# Altium PCB 多普勒1.0.PcbDoc
Units mil, origin at the board's own origin, x right, y up, seen from the top; angles counter-clockwise.
Board outline 3935 x 3935 mil, 2 copper layers (Top Layer, Bottom Layer); 98 components, 79 nets, 364 pads, 52 vias.
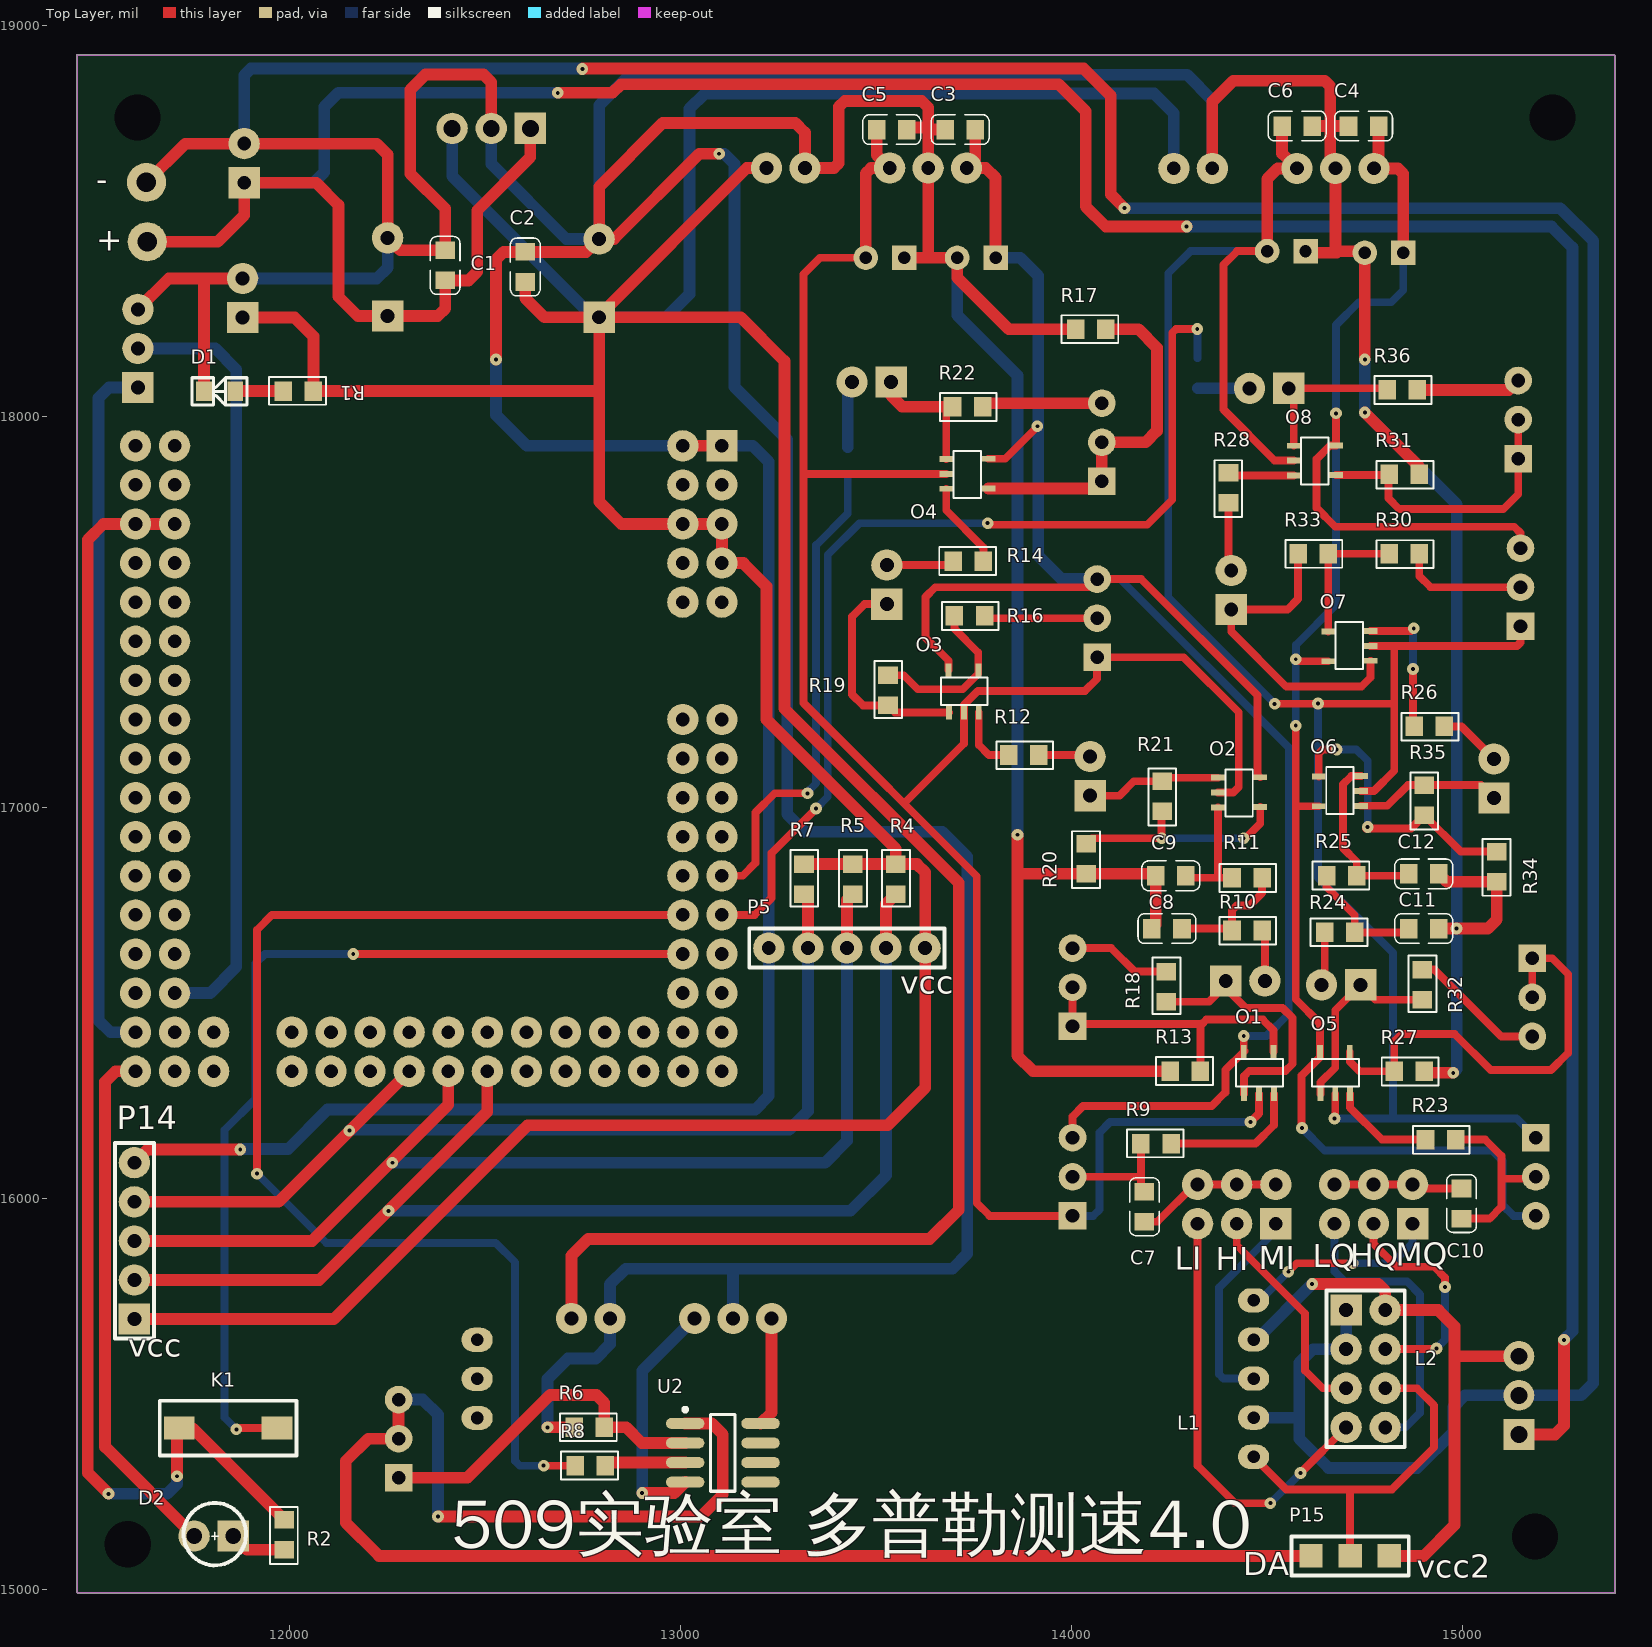
[diagram p0: Top Layer view]
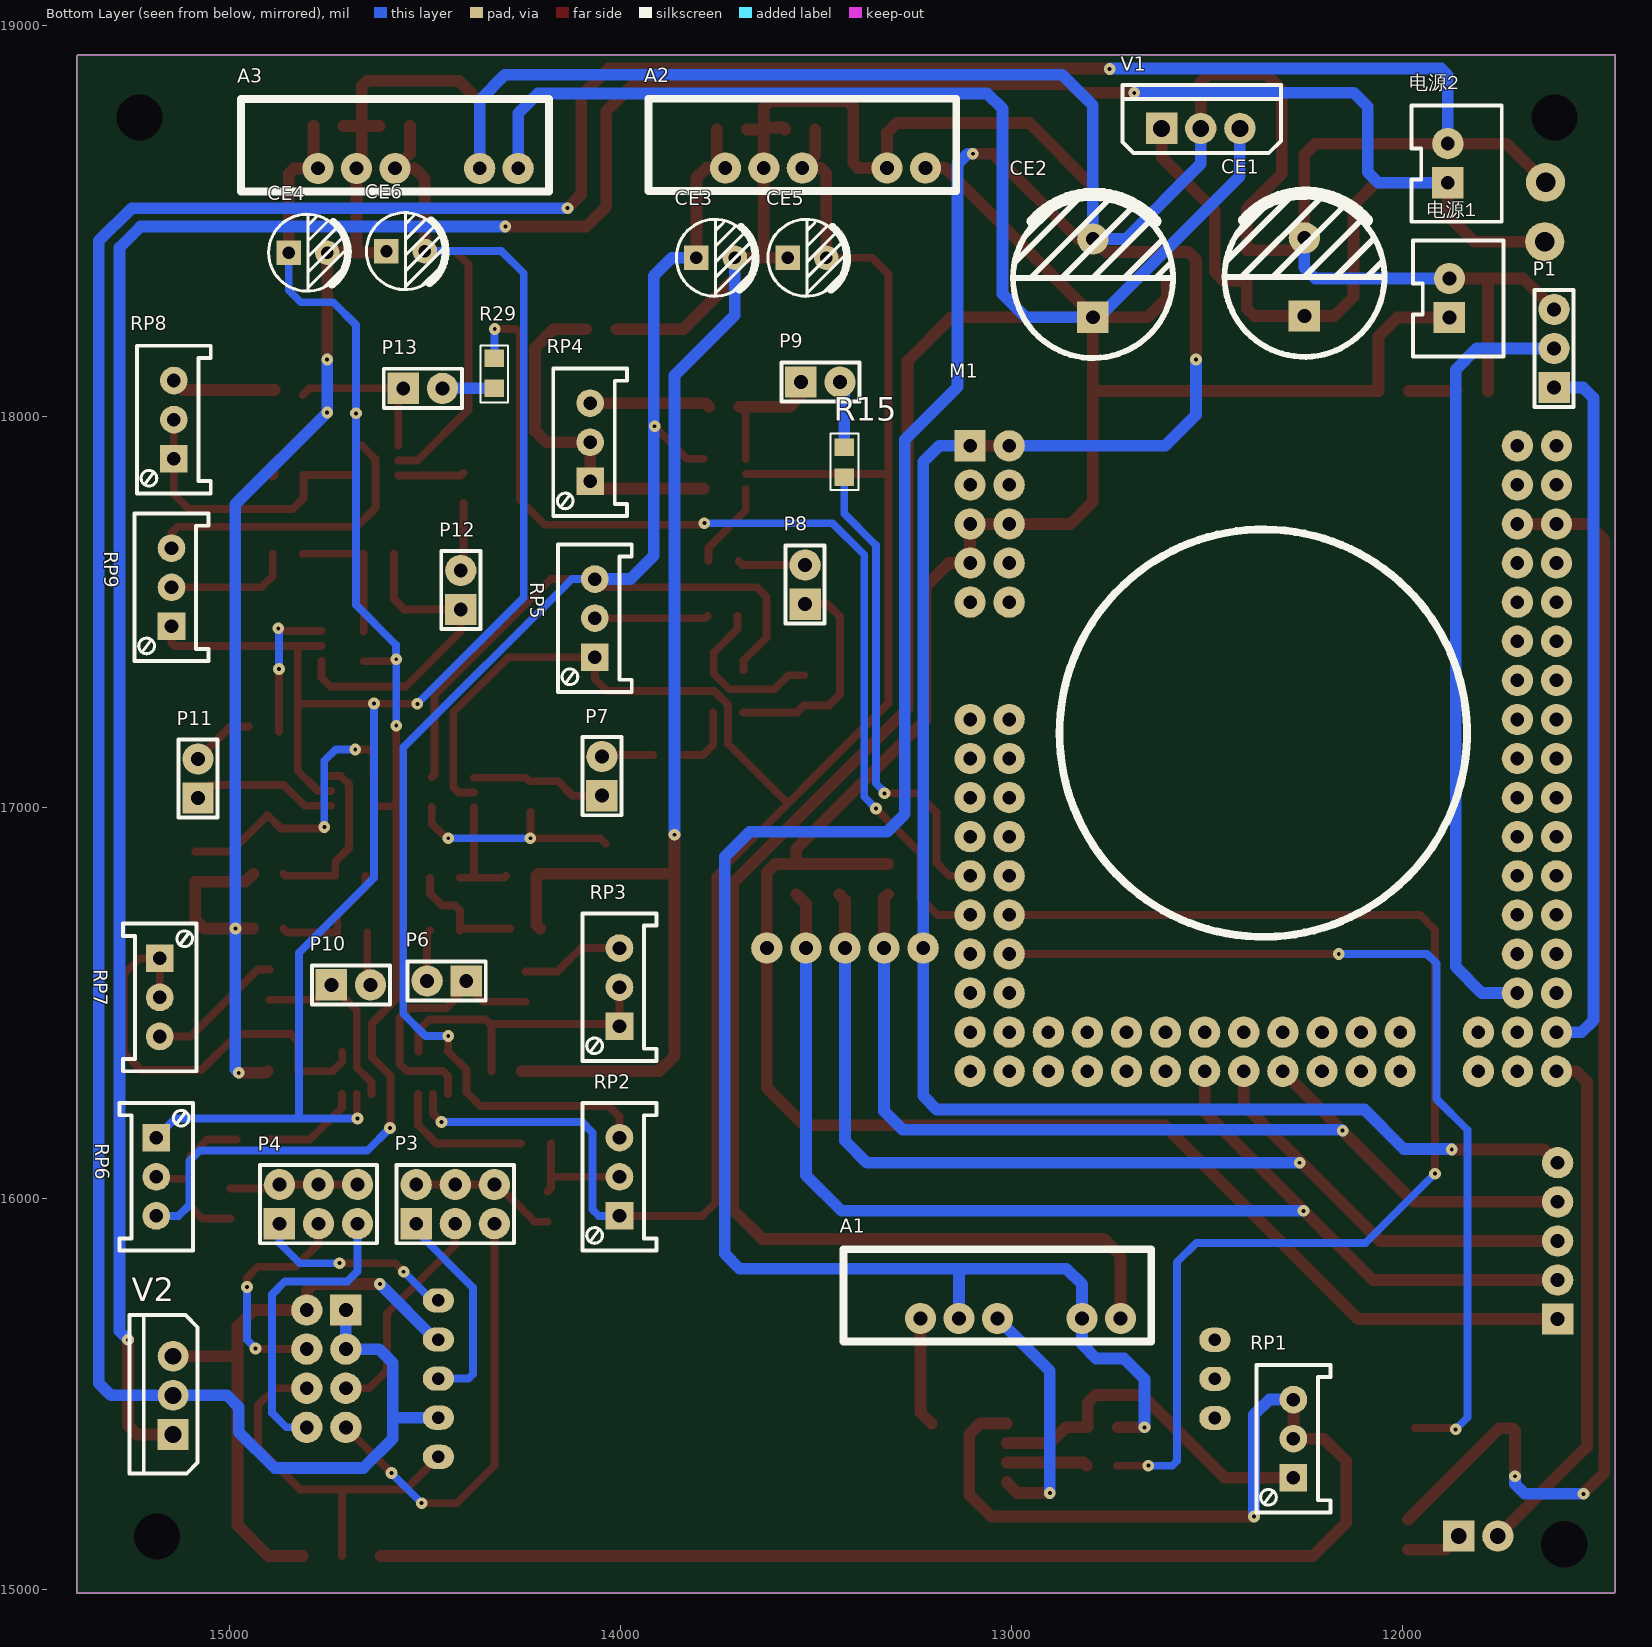
[diagram p1: Bottom Layer view, seen from below]

## Layer stack, top to bottom
Top Solder: solder mask 0.4, Solder Resist, Dk 3.5
Top Layer: signal copper 1.4
Dielectric 1: dielectric 12.6, FR-4, Dk 4.8
Bottom Layer: signal copper 1.4
Bottom Solder: solder mask 0.4, Solder Resist, Dk 3.5

## Board outline
11457,14990 11455,14992 11455,18925 15388,18925 15390,18923 15390,14991 15389,14990

## Design rules (kind name [scope] priority, off if disabled: settings)
Clearance [All] p1: gap=10
PolygonConnect [All] p1: connectstyle=Relief reliefconductorwidth=20 reliefentries=4 polygonreliefangle="45 Angle" airgapwidth=10
RoutingVias [All] p1: holewidth=10 width=30 viastyle="Through Hole" minholewidth=10 minwidth=20 maxholewidth=28 maxwidth=50
SolderMaskExpansion [All] p1: expansion=4
Width [All] p1: maxlimit=30 minlimit=10 preferedwidth=20 minimp=50.000000 maximp=50.000000 favimp=50.000000
30 further rules are at their usual default settings.

## Components (designator, comment, footprint, x,y, rotation, side; value= is the part's Value field where it differs from the comment)
A1 "0509" 0509 13017,15756 r0 bottom
A2 "0509" 0509 13516,18699 r0 bottom
A3 "0509" 0509 14558,18698 r0 bottom
C1 "106" CAP[0805] 12397,18425 r270 top
C2 "106" CAP[0805] 12602,18421 r270 top
C3 "103" CAP[0805] 13676,18734 r0 top
C4 "103" CAP[0805] 14708,18743 r0 top
C5 "103" CAP[0805] 13501,18734 r0 top
C6 "103" CAP[0805] 14538,18743 r0 top
C7 "106" CAP[0805] 14186,15940 r90 top
C8 "103" CAP[0805] 14282,16690 r180 top
C9 "103" CAP[0805] 14292,16825 r180 top
C10 "106" CAP[0805] 14997,16025 r270 top
C11 "103" CAP[0805] 14862,16690 r0 top
C12 "103" CAP[0805] 14862,16830 r0 top
CE1 "470UF" "CAP 5.0*10*16" 12250,18357 r90 bottom
CE2 "100UF" "CAP 5.0*10*16" 12791,18354 r90 bottom
CE3 "10uf" "CAP 2.5*5*11 - BK" 13756,18406 r180 bottom
CE4 "10uf" "CAP 2.5*5*11 - BK" 14799,18419 r180 bottom
CE5 "10uf" "CAP 2.5*5*11 - BK" 13522,18406 r180 bottom
CE6 "10uf" "CAP 2.5*5*11 - BK" 14549,18423 r180 bottom
D1 "LED" LED[0805] 11860,18064 r180 top
D2 "LED" LED 11855,15136 r180 top
K1 "KEY_2" KEY_2 11717,15412 r0 top
L1 "K-LC6雷达" K-LC6雷达 13530,15597 r0 top
L2 "K-MC雷达" K-MC1雷达 14748,15568 r0 top
M1 "VET6_SUKAI" VET6_SUKAI 12335,17215 r180 bottom
O1 "opa820" opa820_5 14467,16310 r90 top
O2 "opa820" opa820_5 14417,17050 r0 top
O3 "opa820" opa820_5 13712,17286 r90 top
O4 "opa820" opa820_5 13722,17865 r0 top
O5 "opa820" opa820_5 14662,16310 r90 top
O6 "opa820" opa820_5 14697,17030 r180 top
O7 "opa820" opa820_5 14721,17401 r180 top
O8 "opa820" opa820_5 14611,17899 r0 top
P1 "H1X3" H2.54_1X3#1 11611,18074 r90 bottom
P3 "H2X3" H2.54_2X3 14522,15935 r180 bottom
P4 "H2X3" H2.54_2X3 14872,15935 r180 bottom
P5 "H1X5" H2.54_1X5#1 13425,16640 r0 top
P6 "H1X2" H2.54_1X2 14394,16556 r0 bottom
P7 "H1X2" H2.54_1X2 14047,17030 r90 bottom
P8 "H1X2" H2.54_1X2 13527,17520 r90 bottom
P9 "H1X2" H2.54_1X2 13538,18088 r180 bottom
P10 "H1X2" H2.54_1X2 14739,16546 r180 bottom
P11 "H1X2" H2.54_1X2 15080,17024 r90 bottom
P12 "H1X2" H2.54_1X2 14408,17506 r90 bottom
P13 "H1X2" H2.54_1X2 14555,18072 r180 bottom
P14 "H1X5" H2.54_1X5#2 11602,15891 r90 top
P15 "H1X3" H2.54_1X3#2 14812,15085 r180 top
R1 "RES" RES[0805] 11983,18065 r0 top
R2 "RES" RES[0805] 11985,15101 r90 top
R4 "RES" RES[0805] 13550,16855 r270 top
R5 "RES" RES[0805] 13440,16855 r270 top
R6 "RES" RES[0805] 12727,15414 r0 top
R7 "RES" RES[0805] 13315,16855 r270 top
R8 "RES" RES[0805] 12730,15316 r0 top
R9 "1K" RES[0805] 14177,16140 r0 top
R10 "2K" RES[0805] 14487,16685 r180 top
R11 "2K" RES[0805] 14487,16820 r180 top
R12 "1K" RES[0805] 13916,17134 r180 top
R13 "1K" RES[0805] 14252,16325 r0 top
R14 "1K" RES[0805] 13697,17630 r0 top
R15 "1K" RES[0805] 13427,17921 r270 bottom
R16 "1K" RES[0805] 13777,17490 r180 top
R17 "1K" RES[0805] 14010,18223 r0 top
R18 "1K" RES[0805] 14242,16580 r270 top
R19 "1K" RES[0805] 13530,17338 r270 top
R20 "1K" RES[0805] 14037,16830 r90 top
R21 "1K" RES[0805] 14232,16990 r90 top
R22 "1K" RES[0805] 13772,18025 r180 top
R23 "1K" RES[0805] 14982,16150 r180 top
R24 "2K" RES[0805] 14647,16680 r0 top
R25 "2K" RES[0805] 14652,16825 r0 top
R26 "1K" RES[0805] 14953,17207 r180 top
R27 "1K" RES[0805] 14902,16325 r180 top
R28 "1K" RES[0805] 14401,17779 r90 top
R29 "1K" RES[0805] 14322,18072 r90 bottom
R30 "1K" RES[0805] 14889,17648.33 r180 top
R31 "1K" RES[0805] 14889,17851.67 r180 top
R32 "1K" RES[0805] 14897,16585 r270 top
R33 "1K" RES[0805] 14656,17649 r180 top
R34 "1K" RES[0805] 15087,16810 r90 top
R35 "1K" RES[0805] 14902,16980 r90 top
R36 "1K" RES[0805] 14884,18068 r180 top
RP1 "10K" 3296W 12278,15385 r90 bottom
RP2 "50k" 3296W 14002,16055 r90 bottom
RP3 "50K" 3296W 14002,16540 r90 bottom
RP4 "10K" 3296W 14077,17934 r90 bottom
RP5 "10k" 3296W 14065,17484 r90 bottom
RP6 "50k" 3296W 15187,16055 r270 bottom
RP7 "50K" 3296W 15178,16514 r270 bottom
RP8 "10K" 3296W 15142,17992 r90 bottom
RP9 "10k" 3296W 15148,17563 r90 bottom
U2 "LM358" SOP_8 13011,15424 r0 top
V1 "78xx" TO220A#1 12515,18737 r180 bottom
V2 "78xx" TO220A#2 15144,15496 r90 bottom
电源1 "HDR-1X2" XH2.54-LI-2P 11879,18303 r90 bottom
电源2 "HDR-1X2" XH2.54-LI-2P 11883,18648 r90 bottom

## Footprints (in the part's own frame and the unit in brackets; to place one, negate y for a bottom-side part, rotate by r counter-clockwise, add the part's x,y. Pads: shape width x height; smd on the part's side, far side on the other; paste and mask are expansions set on the pad)
0509 [mil]
  round 80 hole 35: 1(-296.81,63.34) 2(-198.39,63.34) 3(18.15,63.34) 4(116.58,63.34) 5(215,63.34)
  silkscreen extent -376,-114 412,122, body extent -365,-100 400,115, height 354
3296W [mm] "Precise Multi-Winding Adjustable Resistor"
  rect 1.8x1.8 hole 0.889: 1(-2.54,0)
  round 1.8 hole 0.889: 2(0,0) 3(2.54,0)
  silkscreen extent -4.8,-2.4 4.8,2.4, body extent -4.75,-2.4 4.75,2.4, height 11.52
"CAP 2.5*5*11 - BK" [mm] "脚距2.5mm直径5mm高度11mm"
  rect 1.6x1.6 hole 0.8: 1(-1.25,0)
  round 1.6 hole 0.8: 2(1.25,0)
  silkscreen extent -2.55,-2.5 2.6,2.5, body extent -2.5,-2.5 2.51,2.5, height 11.04
"CAP 5.0*10*16" [mil] "脚距5mm直径10mm高度16mm"
  rect 80x80 hole 35.43: 1(-100,0)
  round 80 hole 35.43: 2(100,0)
  silkscreen extent -204,-205 217,204, body extent -197,-197 197,197, height 631
CAP[0805] [mm]
  rect 1.14x1.27 smd: 1(0,0) 2(1.956,0)
  silkscreen extent -0.9,-0.97 2.86,0.97, body extent -0.05,-0.63 1.95,0.62, height 0.78
H2.54_1X2 [mil]
  rect 80x80 hole 35.43: 1(0,0)
  round 80 hole 35.43: 2(100,0)
  silkscreen extent -50,-50 150,50, body extent -50,-50 150,50, height 336
H2.54_1X3#1 [mil]
  rect 80x80 hole 35.43: 1(0,0)
  round 80 hole 35.43: 2(100,0) 3(200,0)
  silkscreen extent -50,-50 250,50, body extent -50,-50 250,50, height 336
H2.54_1X3#2 [mil]
  rect 60x60 smd: 1(0,0) 2(100,0) 3(200,0)
  silkscreen extent -50,-50 250,50, body extent -50,-50 250,50, height 336
H2.54_1X5#1 [mil]
  round 80 hole 35.43: 1(-200,0) 2(-100,0) 3(0,0) 4(100,0) 5(200,0)
  silkscreen extent -250,-50 250,50, body extent -250,-50 250,50, height 336
H2.54_1X5#2 [mil]
  rect 80x80 hole 35.43: 1(-200,0)
  round 80 hole 35.43: 2(-100,0) 3(0,0) 4(100,0) 5(200,0)
  silkscreen extent -250,-50 250,50, body extent -250,-50 250,50, height 336
H2.54_2X3 [mil]
  rect 80x80 hole 35.43: 1(0,0)
  round 80 hole 35.43: 2(0,100) 3(100,0) 4(100,100) 5(200,0) 6(200,100)
  silkscreen extent -50,-50 250,150, body extent -50,-50 250,150, height 98
K-LC6雷达 [mil] "K-LC6雷达模块"
  oval 80x62 / inner oval 100x50 / far side oval 80x62 hole 32: 0(-1051.18,-159.06) 0(-1051.18,-59.06) 0(-1051.18,40.94) 1(935.04,141.73) 2(935.04,41.73) 3(935.04,-58.27) 4(935.04,-158.27) 5(935.04,-258.27)
K-MC1雷达 [mm] "K-MC1雷达"
  rect 2.032x2.032 hole 0.9: 1(-1.17,3.71)
  round 2.032 hole 0.9: 2(1.37,3.71) 3(-1.17,1.17) 4(1.37,1.17) 5(-1.17,-1.37) 6(1.37,-1.37) 7(-1.17,-3.91) 8(1.37,-3.91)
  silkscreen extent -2.44,-5.18 2.64,4.98, body extent -2.57,-5.18 2.51,4.98, height 8.38
KEY_2 [mm]
  rect 2x1.5 smd: 1(0,0) 2(6.35,0)
  silkscreen extent -1.27,-1.78 7.62,1.78, body extent 0.13,-1.85 6.23,1.85, height 2.5
LED [mil]
  rect 80x80 hole 40: 1(0,0)
  round 80 hole 40: 2(100,0)
  silkscreen extent -33,-85 127,75, body extent -32,-74 107,84, height 205
LED[0805] [mil]
  rect 40x50 smd: 1(0,0) 2(80,0)
  silkscreen extent -30,-35 110,35, body extent 0,-17 81,19, height 33
opa820_5 [mil]
  rect 35.43x15 smd: 1(-43,26) 2(-43,-12) 3(-43,-50) 4(65,-49) 5(65,27)
  silkscreen extent -24,-73 46,47
RES[0805] [mm]
  rect 1.14x1.27 smd: 1(0,0) 2(1.956,0)
  silkscreen extent -0.91,-0.89 2.77,0.91, body extent -0.01,-0.63 1.99,0.63, height 0.55
SOP_8 [mm]
  oval 2.5x0.7 smd: 1(0,0) 2(0,-1.27) 3(0,-2.54) 4(0,-3.81) 5(4.9,-3.81) 6(4.9,-2.54) 7(4.9,-1.27) 8(4.9,0)
  silkscreen extent -0.12,-4.41 3.25,1.02, body extent -0.54,-4.35 5.45,0.55, height 1.55
TO220A#1 [mil] "220，3脚晶体管  封装库来自淘宝卖家 ID：黄晶宝石"
  rect 80x80 hole 43.31: 1(-100,0)
  round 80 hole 43.31: 2(0,0) 3(100,0)
  silkscreen extent -200,-63 205,111, body extent -203,-60 203,114, height 728
TO220A#2 [mil] "220，3脚晶体管  封装库来自淘宝卖家 ID：黄晶宝石"
  rect 78.74x78.74 hole 43.31: 1(-100,0)
  round 78.74 hole 43.31: 2(0,0) 3(100,0)
  silkscreen extent -200,-63 205,111, body extent -203,-60 203,114, height 728
VET6_SUKAI [mil]
  rect 80x80 hole 35: 1(-770,710)
  round 80 hole 35: 2(-670,710) 3(-770,610) 4(-670,610) 5(-770,510) 6(-670,510) 7(-770,410) 8(-670,410) 9(-770,310) 10(-670,310) 15(-770,10) 16(-670,10) 17(-770,-90) 18(-670,-90) 19(-770,-190) 20(-670,-190) 21(-770,-290) 22(-670,-290) 23(-770,-390) 24(-670,-390) 25(-770,-490) 26(-670,-490) 27(-770,-590) 28(-670,-590) 29(-770,-690) 30(-670,-690) 31(-770,-790) 32(-670,-790) 33(-770,-890) 34(-670,-890) 35(-570,-890) 36(-570,-790) 37(-470,-890) 38(-470,-790) 39(-370,-890) 40(-370,-790) 41(-270,-890) 42(-270,-790) 43(-170,-890) 44(-170,-790) 45(-70,-890) 46(-70,-790) 47(30,-890) 48(30,-790) 49(130,-890) 50(130,-790) 51(230,-890) 52(230,-790) 53(330,-890) 54(330,-790) 57(530,-890) 58(530,-790) 59(630,710) 60(730,710) 61(630,610) 62(730,610) 63(630,510) 64(730,510) 65(630,410) 66(730,410) 67(630,310) 68(730,310) 69(630,210) 70(730,210) 71(630,110) 72(730,110) 73(630,10) 74(730,10) 75(630,-90) 76(730,-90) 77(630,-190) 78(730,-190) 79(630,-290) 80(730,-290) 81(630,-390) 82(730,-390) 83(630,-490) 84(730,-490) 85(630,-590) 86(730,-590) 87(630,-690) 88(730,-690) 89(630,-790) 90(730,-790) 91(630,-890) 92(730,-890)
  silkscreen extent -541,-546 501,496, body extent -820,-940 780,760, height 335
XH2.54-LI-2P [mil] "接插件，2P  淘宝ID:黄晶宝石   店铺网址:https://shop463601444.taobao.com"
  rect 80x80 hole 35.43: 1(-50,0)
  round 80 hole 35.43: 2(50,0)
  silkscreen extent -150,-138 147,93, body extent -148,-130 148,94, height 278

## Part data
C1 C2 C3 C4 C5 C6 C7 C8 C9 C10 C11 C12: library part CAP
CE1 CE2 CE3 CE4 CE5 CE6: library part CE, "直插电解电容"
R9 R10 R11 R12 R13 R14 R15 R16 R17 R18 R19 R20 R21 R22 R23 R24 R25 R26 R27 R28 R29 R30 R31 R32 R33 R34 R35 R36: library part RES
RP1 RP2 RP3 RP4 RP5 RP6 RP7 RP8 RP9: library part RP, "单联电位器"
V1 V2: "LM78XX系列线性稳压芯片"
电源1 电源2: library part "Header 2", "2P接插件"

## Free pads (board coordinates)
  round 80 hole 118.11: 0(11585,15115) 0(11610,18765) 0(15185,15135) 0(15230,18765)
  round 100 hole 50: 2(11633,18599) 3(11635,18447)

## Via types
v1: diameter 30, hole 10, Top Layer to Bottom Layer, 52 vias

## Nets (pads, with @x,y where several pads share a name; then routed paths per layer and width w, separated by ;. In a path a pad name is that pad's centre, name@x,y a point inside that pad or via, vN(x,y) a via of type N, cw(c..) or ccw(c..) an arc to the next point about the centre after c; other vN are vias at no path point)
3.3V: K1.1 M1.63 M1.64 R2.2 | length 3397.7
  Top Layer w30: v1(11536,15244) 11482.5,15297.5 11482.5,17684.5 11523,17725 M1.64 M1.63 ; v1(11711,15289) 11711,15406 K1.1 11751,15412 R2.2
  Bottom Layer w30: v1(11536,15244) 11686,15244 11711,15269 v1(11711,15289)
+5V: A2.5 C3.2 CE3.1 O1.5 O2.5 O3.5 O4.5 RP2.3 RP5.3 | length 5111.2
  Top Layer w20: O3.5 13685,17375 13626,17434 13626,17538 13651,17563 14044,17563 RP5.3 14178,17584 14475,17287 14475,17084 O2.5 ; O4.5 13830,17892 v1@13909.5,17971.5 ; RP2.3 14002,16209 14029,16236 14358,16236 14393,16271 14393,16328 O1.5 14442,16377 14440,16379 v1(14440,16415)
  Top Layer w30: C3.2 13753,18657.65 A2.5 13780.34,18635.65 13805.21,18610.79 CE3.1
  Bottom Layer w20: RP5.3 14124,17584 14555,17153 14555,16472 14498,16415 v1(14440,16415)
  Bottom Layer w30: CE3.1 13868,18406 13914,18360 13914,17644 13974,17584 RP5.3
  other v1: 13912,17975
+5V2: A3.5 C4.2 CE4.1 O5.5 O6.5 O7.5 O8.5 RP6.3 RP9.3 | length 4607.8
  Top Layer w20: 14573,17008 14578,17003 O6.5 ; v1(14573,17209) 14573,16509 14635,16447 O5.5 14635,16361 14588,16314 14588,16181 v1(14589,16180) ; v1(14573,17379) 14578,17374 O7.5 ; v1(14676,18008) O8.5 14661,17926 14626,17891 14626,17766 14674,17718 15132,17718 15148,17702 RP9.3
  Top Layer w30: C4.2 14785,18646.65 A3.5 14834.34,18634.65 14848.21,18620.79 CE4.1
  Bottom Layer w20: v1(14573,17209) v1(14573,17379) 14574,17378 14574,17416 14676,17518 v1(14676,18008) 14676,18234 14734,18292 14817,18292 14848.21,18323.21 CE4.1 ; v1(14589,16180) 14647,16122 15076,16122 15102,16096 15102,15983 15130,15955 RP6.3
+9V: A1.5 U2.8 | length 280.3
  Top Layer w30: U2.8 13232,15452.09 A1.5
-5V: A2.3 C5.1 CE5.2 O1.2 O2.2 O3.2 O4.2 RP2.1 RP5.1 | length 5917.2
  Top Layer w20: CE5.2 13356,18406 13314,18364 13314,17855 ; 13568,17013 13574,17013 13724,17163 O3.2 13724,17262 13760,17298 14034,17298 14065,17329 RP5.1 14286,17384 14427,17243 14427,17052 14413,17038 O2.2 ; O4.2 13316,17853 13314,17855 ; RP2.1 13790,15955 13757,15988 13757,16824 13314,17267 13314,17855 ; v1(14457,16195) 14479,16217 O1.2
  Top Layer w30: CE5.2 13472.79,18621.79 13486.66,18635.65 A2.3 13501,18668.81 C5.1
  Bottom Layer w20: RP2.1 14055,15955 14071,15971 14071,16168 14098,16195 v1(14457,16195)
-5V2: A3.3 C6.1 CE6.2 O5.2 O6.2 O7.2 O8.2 RP6.1 RP9.1 | length 5520
  Top Layer w20: CE6.2 14423,18423 14388,18388 14388,18018 14519,17887 O8.2 ; v1(14519,17265) 14825,17265 ; v1(14672,16204) 14674,16206 O5.2 ; O6.2 14773,17042 14825,17094 14825,17265 ; O7.2 14824,17413 ; RP9.1 15148,17422 15139,17413 14824,17413 ; 14824,17413 14825,17412 14825,17265
  Top Layer w30: CE6.2 14499.79,18607.79 14526.66,18634.65 A3.3 14538,18672.81 C6.1
  Bottom Layer w20: CE6.2 14304,18423 14247,18366 14247,17537 v1(14519,17265) ; v1(14630,17266) 14630,16820 14822,16628 14822,16208 14818,16204 ; v1(14672,16204) 14818,16204 ; RP6.1 15138,16204 14818,16204
-9V: A1.3 U2.4 | length 623.8
  Top Layer w30: v1(12901,15246) 12983,15246 U2.4
  Bottom Layer w30: v1(12901,15246) 12901,15558.5 A1.3
DA: M1.26 R8.1 | length 3149.7
  Top Layer w20: v1(11916,16063) 11916,16687 11954,16725 M1.26 ; v1(12649,15316) R8.1
  Bottom Layer w20: v1(11916,16063) 12093,15886 12526,15886 12576,15836 12576,15328 12588,15316 v1(12649,15316)
ENABLE: M1.33
GND: A1.2 A1.4 A2.2 A2.4 A3.2 A3.4 C1.1 C2.1 C3.1 C4.1 C5.2 C6.2 C8.2 C9.2 C11.2 C12.2 CE1.2 CE2.2 CE3.2 CE4.2 CE5.1 CE6.1 D1.2 L1.4 L2.1 L2.3 M1.1 M1.2 P1.3 P5.1 P14.5 pad.2 R6.1 R13.1 R17.1 R20.1 R27.1 R31.1 R34.1 V1.2 V2.2 电源1.2 电源2.2 | length 33404.6
  Top Layer w30: P14.5 11636,16125 v1(11873,16125) ; P1.3 11690,18353 11782,18353 ; pad.2 11732,18698 电源2.2 12222,18698 12250,18670 CE1.2 12282,18425 C1.1 12397,18532 12308,18621 12308,18836 12347,18875 12495,18875 12515,18855 V1.2 ; D1.2 11780,18351 11782,18353 ; 电源1.2 11782,18353 ; v1(12527,18146) 12527,18401 12547,18421 C2.1 12758,18421 CE2.2 ; v1(12659,15414) R6.1 ; v1(12748,18889) 12749,18890 14031,18890 14100,18821 14100,18568 v1(14135,18533) ; M1.2 M1.1 ; v1(13098,18672) 13047,18672 12829,18454 CE2.2 ; CE5.1 13633,18406 ; C5.2 13583.42,18739.42 13632.58,18739.42 ; C3.1 13632.58,18734 ; R17.1 13839,18223 13706.79,18355.21 CE3.2 13633,18406 ; C8.2 14215,16700 C9.2 14210,16830 R20.1 13868,16830 13861,16837 v1(13861,16930) 13861,16365 13901,16325 R13.1 ; A3.2 14359.61,18805.62 14413,18859 14647,18859 14661,18845 14661,18745 ; CE6.1 14602.21,18419 14678.15,18419 14674.58,18422.58 ; C6.2 14659,18743 14661,18745 ; C4.1 14663,18743 14661,18745 ; v1(14749.79,18010.21) 14889,17871 R31.1 ; v1(14749.79,18145.79) CE4.2 14746.21,18422.58 14674.58,18422.58 ; R27.1 14906,16321 v1(14976,16321) ; C11.2 v1(14984,16690) 15064,16690 15087,16713 R34.1 14959,16810 C12.2 ; CE2.2 12791,18588 12954,18751 13293,18751 13317.61,18726.38 A2.2 13391.66,18635.65 13404,18648 13404,18792 13419,18807 13616,18807 13632.58,18790.42 13632.58,18739.42 ; 13632.58,18734 A2.4 13632.58,18406.42 13633,18406 ; 13632.58,18734 13632.58,18739.42 ; 14661,18745 14661,18648.23 A3.4 14674.58,18422.58
  Bottom Layer w30: v1(11873,16125) 11874,16126 11995,16126 12096,16227 13190,16227 13225,16262 P5.1 13225,17884 13184,17925 M1.1 ; 电源1.2 12222,18353 12250,18381 CE1.2 ; 电源2.2 11883,18873 11900,18890 12747,18890 v1(12748,18889) ; V1.2 12515,18646 12707,18454 CE2.2 12791,18796 12869,18874 14295,18874 14359.61,18809.38 A3.2 ; v1(12527,18146) 12527,18004 12606,17925 M1.2 ; v1(12659,15414) 12659,15538 12711,15590 12782,15590 12818.61,15626.61 A1.2 12818.61,15779.61 12859,15820 13695,15820 13733,15858 13733,16874 13669,16938 13317,16938 13272,16983 13272,17941 13137,18076 13137,18646 13111,18672 v1(13098,18672) ; 13127,15820 13133.58,15813.42 A1.4 ; CE3.2 13706.79,18259.21 13861,18105 v1(13861,16930) ; v1(14135,18533) 15250,18533 15334,18449 15334,15527 15303,15496 V2.2 15006,15496 14976,15466 14976,15402 14884,15310 14657,15310 14582,15385 14582,15579 14617.06,15614.06 L2.3 L2.1 ; L1.4 14577.73,15438.73 14582,15443 ; v1(14749.79,18145.79) v1(14749.79,18010.21) 14985,17775 14985,16330 v1(14976,16321)
IFI: C7.1 P3.2 P3.4 P3.6 | length 375.4
  Top Layer w20: C7.1 14219,15940 14314,16035 P3.6 P3.4 P3.2
IFIOUT: M1.23 R15.2 | length 1238.3
  Top Layer w20: M1.23 13158,16825 13191,16858 13191,16987 13240,17036 v1(13324,17036)
  Bottom Layer w20: v1(13324,17036) 13320,17036 13346,17062 13346,17671 13427,17752 R15.2
IFQ: C10.1 P4.2 P4.4 P4.6 | length 329.1
  Top Layer w20: P4.6 P4.4 P4.2 14882,16025 C10.1
IFQOUT: M1.25 R29.2 | length 2595.7
  Top Layer w20: M1.25 13189,16725 13232,16768 13232,16883 v1(13346,16997) ; v1(13785,17727) 13789,17723 14193,17723 14257,17787 14257,18214 14267,18224 v1(14321,18224)
  Bottom Layer w20: v1(13346,16997) 13376,17027 13376,17646 13457,17727 v1(13785,17727) ; v1(14321,18224) 14322,18223 R29.2
KEY: K1.2 M1.28 | length 2445.3
  Top Layer w20: v1(11863,15409) 11866,15412 K1.2 ; v1(12162,16625) M1.28
  Bottom Layer w20: v1(11863,15409) 11833,15439 11833,16175 11912,16254 11912,16601 11936,16625 v1(12162,16625)
NetC1_2: C1.2 CE1.1 pad.3 V1.1 V2.1 电源2.1 | length 8809.3
  Top Layer w30: pad.3 11815,18447 11883,18515 电源2.1 12067,18598 12124,18541 12124,18307 12174,18257 CE1.1 12378,18257 12397,18276 C1.2 12457,18348 12479,18370 12479,18527 12615,18663 V1.1 ; v1(12685,18828) 12825,18828 12847,18850 13967,18850 14036,18781 14036,18537 14087,18486 v1(14294,18486) ; V2.1 15237,15396 15259,15418 v1(15259,15638)
  Bottom Layer w30: 电源2.1 12061,18598 12088,18625 12088,18792 12124,18828 v1(12685,18828) ; v1(14294,18486) 15227,18486 15281,18432 15281,15660 v1(15259,15638)
NetC7_2: C7.2 R9.1 RP2.2 | length 303
  Top Layer w20: RP2.2 14174,16055 14177,16052 ; R9.1 14177,16052 ; C7.2 14177,16026 14177,16052
NetC8_1: C8.1 R10.2 R11.1 | length 316.3
  Top Layer w20: C8.1 14405,16690 R10.2 14410,16737 14422,16749 14455,16749 14487,16781 R11.1
NetC9_1: C9.1 O2.3 R11.2 | length 301.3
  Top Layer w20: C9.1 14297,16820 14377,16820 ; O2.3 14374,16823 14377,16820 ; R11.2 14377,16820
NetC10_2: C10.2 R23.1 RP6.2 | length 469.5
  Top Layer w20: R23.1 15058,16150 15099,16109 15099,16050 ; C10.2 15069,15948 15099,15978 15099,16050 ; RP6.2 15182,16050 15099,16050
NetC11_1: C11.1 R24.2 R25.1 | length 317
  Top Layer w20: R25.1 14652,16796 14724,16724 R24.2 14852,16680 C11.1
NetC12_1: C12.1 O6.3 R25.2 | length 438.3
  Top Layer w20: O6.3 14715,17080 14694,17059 14694,16896 14729,16861 R25.2 14857,16825 C12.1
NetD1_1: D1.1 R1.1 | length 123.4
  Top Layer w30: D1.1 11861,18065 R1.1
NetD2_1: D2.1 R2.1 | length 144.5
  Top Layer w30: D2.1 11890,15101 R2.1
NetL1_1: L1.1 P4.1 | length 517
  Top Layer w20: v1(14554,15812) 14576,15834 v1(14718,15834)
  Bottom Layer w20: L1.1 14480.73,15738.73 v1(14554,15812) ; v1(14718,15834) 14820,15834 14872,15886 P4.1
NetL1_3: L1.3 P3.1 | length 537.8
  Bottom Layer w20: L1.3 14388.27,15538.73 14377,15550 14377,15772 14522,15917 P3.1
NetL2_4: L2.4 P4.3 | length 592
  Top Layer w20: P4.3 14772,15884 14831,15825 14927,15825 14955,15797 v1(14955,15773) ; L2.4 14931.06,15614.06 v1(14933,15616)
  Bottom Layer w20: v1(14933,15616) 14955,15638 v1(14955,15773)
NetL2_5: L2.5 P3.3 | length 572
  Top Layer w20: P3.3 14422,15880 14597,15705 14597,15559 14641.94,15514.06 L2.5
NetL2_7: L2.7 P3.5 | length 1119.2
  Top Layer w20: P3.5 14322,15316 14418,15220 v1(14508,15220) ; v1(14585,15297) 14585,15297.13 L2.7
  Bottom Layer w20: v1(14508,15220) v1(14585,15297)
NetL2_8: L2.8 P4.5 | length 772.8
  Bottom Layer w20: P4.5 14672,15813 14698,15787 14858,15787 14891,15754 14891,15451 14854.06,15414.06 L2.8
NetM1_43: M1.43 P5.4 P14.2 R4.2 | length 3225.2
  Top Layer w30: P14.2 12075,15791 v1(12252,15968) 12505,16221 M1.43 ; P5.4 13525,16753 R4.2
  Bottom Layer w30: v1(12252,15968) 13434,15968 13525,16059 P5.4
NetM1_45: M1.45 P5.3 P14.3 R5.2 | length 2856.6
  Top Layer w30: P14.3 12057,15891 12405,16239 M1.45 ; P5.3 13425,16763 R5.2
  Bottom Layer w30: v1(12262,16091) 13369,16091 13425,16147 P5.3
NetM1_47: M1.47 P5.2 P14.4 R7.2 | length 2594.2
  Top Layer w30: P14.4 11971,15991 M1.47 ; R7.2 13325,16768 P5.2
  Bottom Layer w30: v1(12152,16173) 12154,16175 13277,16175 13325,16223 P5.2
NetO1_1: O1.1 P6.1 R18.2 | length 680.5
  Top Layer w20: R18.2 14351,16503 14394,16546 14394,16538 14445,16487 14539,16487 14565,16461 14565,16344 14547,16326 14454,16326 14441,16313 O1.1
NetO1_3: O1.3 R9.2 | length 362.5
  Top Layer w20: R9.2 14470,16140 14517,16187 O1.3
NetO1_4: O1.4 R13.2 RP3.1 RP3.2 | length 809.9
  Top Layer w20: RP3.2 RP3.1 14008,16446 14333,16446 ; R13.2 14329,16442 14333,16446 ; O1.4 14516,16430 14489,16457 14344,16457 14333,16446
NetO2_1: O2.1 P7.1 R21.2 | length 346.1
  Top Layer w20: P7.1 14122,17030 14159,17067 R21.2 14241,17076 O2.1
NetO2_4: O2.4 R20.2 R21.1 | length 581.2
  Top Layer w20: R20.2 14051,16921 v1(14230,16921) R21.1@14230,16988 ; v1(14440,16921) 14440,16917 14482,16959 O2.4
  Bottom Layer w20: v1(14230,16921) v1(14440,16921)
NetO3_1: O3.1 P8.1 R19.2 | length 568.3
  Top Layer w20: P8.1 13470,17520 13438,17488 13438,17289 13466,17261 R19.2 13548,17243 O3.1
NetO3_3: O3.3 R12.2 | length 170.8
  Top Layer w20: O3.3 13762,17160 13788,17134 R12.2
NetO3_4: O3.4 R16.2 R19.1 | length 435.7
  Top Layer w20: R19.1 13570,17338 13606,17302 13721,17302 13761,17342 O3.4 13761,17396 13700,17457 R16.2
NetO4_1: O4.1 P9.1 R22.2 | length 344.2
  Top Layer w20: O4.1 13679,18009 R22.2
  Top Layer w30: P9.1 13538,18053 13566,18025 R22.2
NetO4_3: O4.3 R14.2 | length 224.4
  Top Layer w20: O4.3 13679,17760 13774,17665 R14.2
NetO4_4: O4.4 R17.2 RP4.1 RP4.2 | length 913.9
  Top Layer w30: O4.4 14059,17816 RP4.1 RP4.2 14189,17934 14218,17963 14218,18176 14171,18223 R17.2
NetO5_1: O5.1 P10.1 R32.2 | length 495.4
  Top Layer w20: O5.1 14636,16296 14674,16334 14674,16481 P10.1 14777,16508 R32.2
NetO5_3: O5.3 R23.2 | length 262
  Top Layer w20: O5.3 14712,16232 14794,16150 R23.2
NetO5_4: O5.4 R27.2 RP7.1 RP7.2 | length 1145.1
  Top Layer w20: O5.4 14711,16350 14736,16325 R27.2 14825,16402 14843,16420 14980,16420 15072,16328 15226,16328 15270,16372 15270,16573 15229,16614 RP7.1 RP7.2
NetO6_1: O6.1 P11.1 R35.2 | length 375.6
  Top Layer w20: O6.1 14807,17004 14860,17057 R35.2 15047,17057 P11.1
NetO6_4: O6.4 R34.2 R35.1 | length 761.4
  Top Layer w20: O6.4 14632,17138 14642,17148 v1(14678,17148) ; v1(14757,16950) 14753,16946 14868,16946 R35.1 14995,16887 R34.2
  Bottom Layer w20: v1(14678,17148) 14728,17148 14757,17119 v1(14757,16950)
NetO7_1: O7.1 P12.1 R33.2 | length 821.1
  Top Layer w20: R33.2 14579,17533 14552,17506 P12.1 14408,17450 14549,17309 14741,17309 14764,17332 O7.1
NetO7_3: O7.3 R26.2 | length 378.7
  Top Layer w20: O7.3 14868,17451 v1(14875,17458) ; R26.2@14873,17194 14873,17249 v1(14873,17354)
  Bottom Layer w20: v1(14873,17354) 14873,17456 v1(14875,17458)
NetO7_4: O7.4 R30.2 R33.1 | length 355.3
  Top Layer w20: O7.4 R33.1 14811.33,17649 R30.2
NetO8_1: O8.1 P13.1 R36.2 | length 416.4
  Top Layer w20: O8.1 14568,18059 P13.1 14795,18072 R36.2@14812,18055
NetO8_3: O8.3 R28.2 | length 169.9
  Top Layer w20: R28.2 14408,17849 O8.3
NetO8_4: O8.4 R31.2 RP8.1 RP8.2 | length 743.5
  Top Layer w20: O8.4 14810.33,17850 14810.33,17790.67 14838,17763 15104,17763 15142,17801 RP8.1 RP8.2
NetP6_2: P6.2 R10.1 | length 141.9
  Top Layer w20: R10.1 14494,16678 P6.2@14494,16546
NetP7_2: P7.2 R12.1 | length 132.7
  Top Layer w20: R12.1 14043,17134 P7.2
NetP8_2: P8.2 R14.1 | length 174.1
  Top Layer w20: P8.2 13687,17620 R14.1
NetP9_2: P9.2 R15.1 | length 171.6
  Bottom Layer w30: R15.1 13427,18077 P9.2
NetP10_2: P10.2 R24.1 | length 137.3
  Top Layer w20: P10.2 14647,16554 R24.1
NetP11_2: P11.2 R26.1 | length 163.4
  Top Layer w20: R26.1@14951,17207 14997,17207 P11.2
NetP12_2: P12.2 R28.1 | length 175.9
  Top Layer w20: R28.1 14401,17613 P12.2
NetP13_2: P13.2 R29.1 | length 133
  Bottom Layer w30: R29.1 P13.2
NetP15_3: P15.3 RP1.2 RP1.3 U2.1 | length 4310.8
  Top Layer w30: RP1.3 RP1.2 12200,15385 12143,15328 12143,15170 12228,15085 P15.3 ; v1(12379,15186) 13051,15186 13107,15242 13107,15396 13079,15424 U2.1
  Bottom Layer w30: RP1.3 12340,15485 12379,15446 v1(12379,15186)
NetR6_2: R6.2 RP1.1 U2.2 | length 908.7
  Top Layer w30: RP1.1 12454,15285 12666,15497 12784,15497 12804,15477 R6.2 12860,15414 12900,15374 U2.2
NetR8_2: R8.2 U2.3 | length 207.3
  Top Layer w30: R8.2 12815,15324 U2.3
NetR16_1: R16.1 RP5.2 | length 290.5
  Top Layer w20: R16.1 13783,17484 RP5.2
NetR18_1: R18.1 RP3.3 | length 264.9
  Top Layer w20: RP3.3 14101,16640 14161,16580 R18.1
NetR22_1: R22.1 RP4.3 | length 308.7
  Top Layer w30: R22.1 13781,18034 RP4.3
NetR30_1: R30.1 RP9.2 | length 327.3
  Top Layer w20: R30.1 14889,17592 14918,17563 RP9.2
NetR32_1: R32.1 RP7.3 | length 351.8
  Top Layer w20: R32.1 14928,16585 15099,16414 RP7.3
NetR36_1: R36.1 RP8.3 | length 267.9
  Top Layer w30: R36.1 15118,18068 RP8.3
PA8: D2.2 M1.92 | length 1345.6
  Top Layer w30: M1.92 11554,16325 11527,16298 11527,15364 D2.2
PA9TX: M1.87 P1.2 | length 1988.1
  Bottom Layer w30: P1.2 11809,18174 11863,18120 11863,16592 11796,16525 M1.87
PA10RX: M1.90 P1.1 | length 1811
  Bottom Layer w30: M1.90 11541,16425 11510,16456 11510,18047 11537,18074 P1.1
PA11: M1.88
VCC: A1.1 A2.1 A3.1 C2.2 CE2.1 M1.5 M1.6 M1.7 P5.5 P14.1 R1.2 R4.1 R5.1 R7.1 V1.3 电源1.1 | length 13844.3
  Top Layer w30: P14.1@11602,15703 P14.1 12112,15691 12608,16187 13529,16187 13625,16283 P5.5 13625,16834 13604,16855 R4.1 ; 电源1.1 12012,18253 12060,18205 R1.2 12791,18065 ; C2.2 12602,18303 12651,18254 13153,18254 13265,18142 13265,17253 13711,16807 13711,15970 13637,15896 12763,15896 12720.19,15853.19 A1.1 A1.1@12709.84,15703 ; CE2.1@12787,18254 13168.66,18635.65 A2.1 ; CE2.1 12791,18065 ; R7.1 R5.1 R4.1 ; 12791,18065 12791,17782 12848,17725 M1.6 M1.5 M1.7 13160,17625 13219,17566 13219,17225 13550,16894 R4.1
  Bottom Layer w30: V1.3 12415,18615 12776,18254 CE2.1 12963,18254 13022,18313 13022,18787 13061,18826 14211,18826 14261.19,18775.81 A3.1
VCC2: L1.2 L2.2 P15.1 V2.3 | length 1522.7
  Top Layer w30: v1(14615,15781) 14784,15781 14801.94,15763.06 L2.2 14937.94,15714.06 14979,15673 14979,15653 ; P15.1 14900,15085 14979,15164 14979,15593 ; 14980,15654 14979,15653 ; V2.3 14982,15596 14979,15593 ; 14979,15593 14979,15653
  Bottom Layer w30: L1.2 14472.73,15638.73 v1(14615,15781)
VCO: L1.5 L2.6 P15.2 | length 958.7
  Top Layer w20: L1.5 14548.77,15255 14819,15255 14927,15363 14927,15470 14882.94,15514.06 L2.6 ; P15.2 14712,15252
pads on no net: L1.0 M1.3 M1.4 M1.8 M1.9 M1.10 M1.15 M1.16 M1.17 M1.18 M1.19 M1.20 M1.21 M1.22 M1.24 M1.27 M1.29 M1.30 M1.31 M1.32 M1.34 M1.35 M1.36 M1.37 M1.38 M1.39 M1.40 M1.41 M1.42 M1.44 M1.46 M1.48 M1.49 M1.50 M1.51 M1.52 M1.53 M1.54 M1.57 M1.58 M1.59 M1.60 M1.61 M1.62 M1.65 M1.66 M1.67 M1.68 M1.69 M1.70 M1.71 M1.72 M1.73 M1.74 M1.75 M1.76 M1.77 M1.78 M1.79 M1.80 M1.81 M1.82 M1.83 M1.84 M1.85 M1.86 M1.89 M1.91 U2.5 U2.6 U2.7

## Keep-outs
Keep-Out Layer:
  the board outline again, w5

## Silkscreen, mask and mechanical layers (free items; w line width, h text height)
Top Overlay:
  text "-" at 11505,18558 h100
  text "+" at 11504,18405 h100
  text "vcc" at 13561,16504 h100
  text "MQ" at 14829,15808 h100
  text "HQ" at 14713,15806 h100
  text "LQ" at 14616,15805 h100
  text "MI" at 14478,15799 h100
  text "LI" at 14264,15798 h100
  text "HI" at 14368,15797 h100
  text "vcc" at 11586,15576 h100
  text "509实验室 多普勒测速4.0" at 12413,15062 h220
  text "DA" at 14439,15016 h100
  text "vcc2" at 14882,15010 h100